# Altium PCB PMSM_M007R_Fan.PcbDoc
Units mil, origin at the board's own origin, x right, y up, seen from the top; angles counter-clockwise.
Board outline 2867 x 1502 mil, 2 copper layers (Top Layer, Bottom Layer); 61 components, 39 nets, 179 pads, 116 vias.
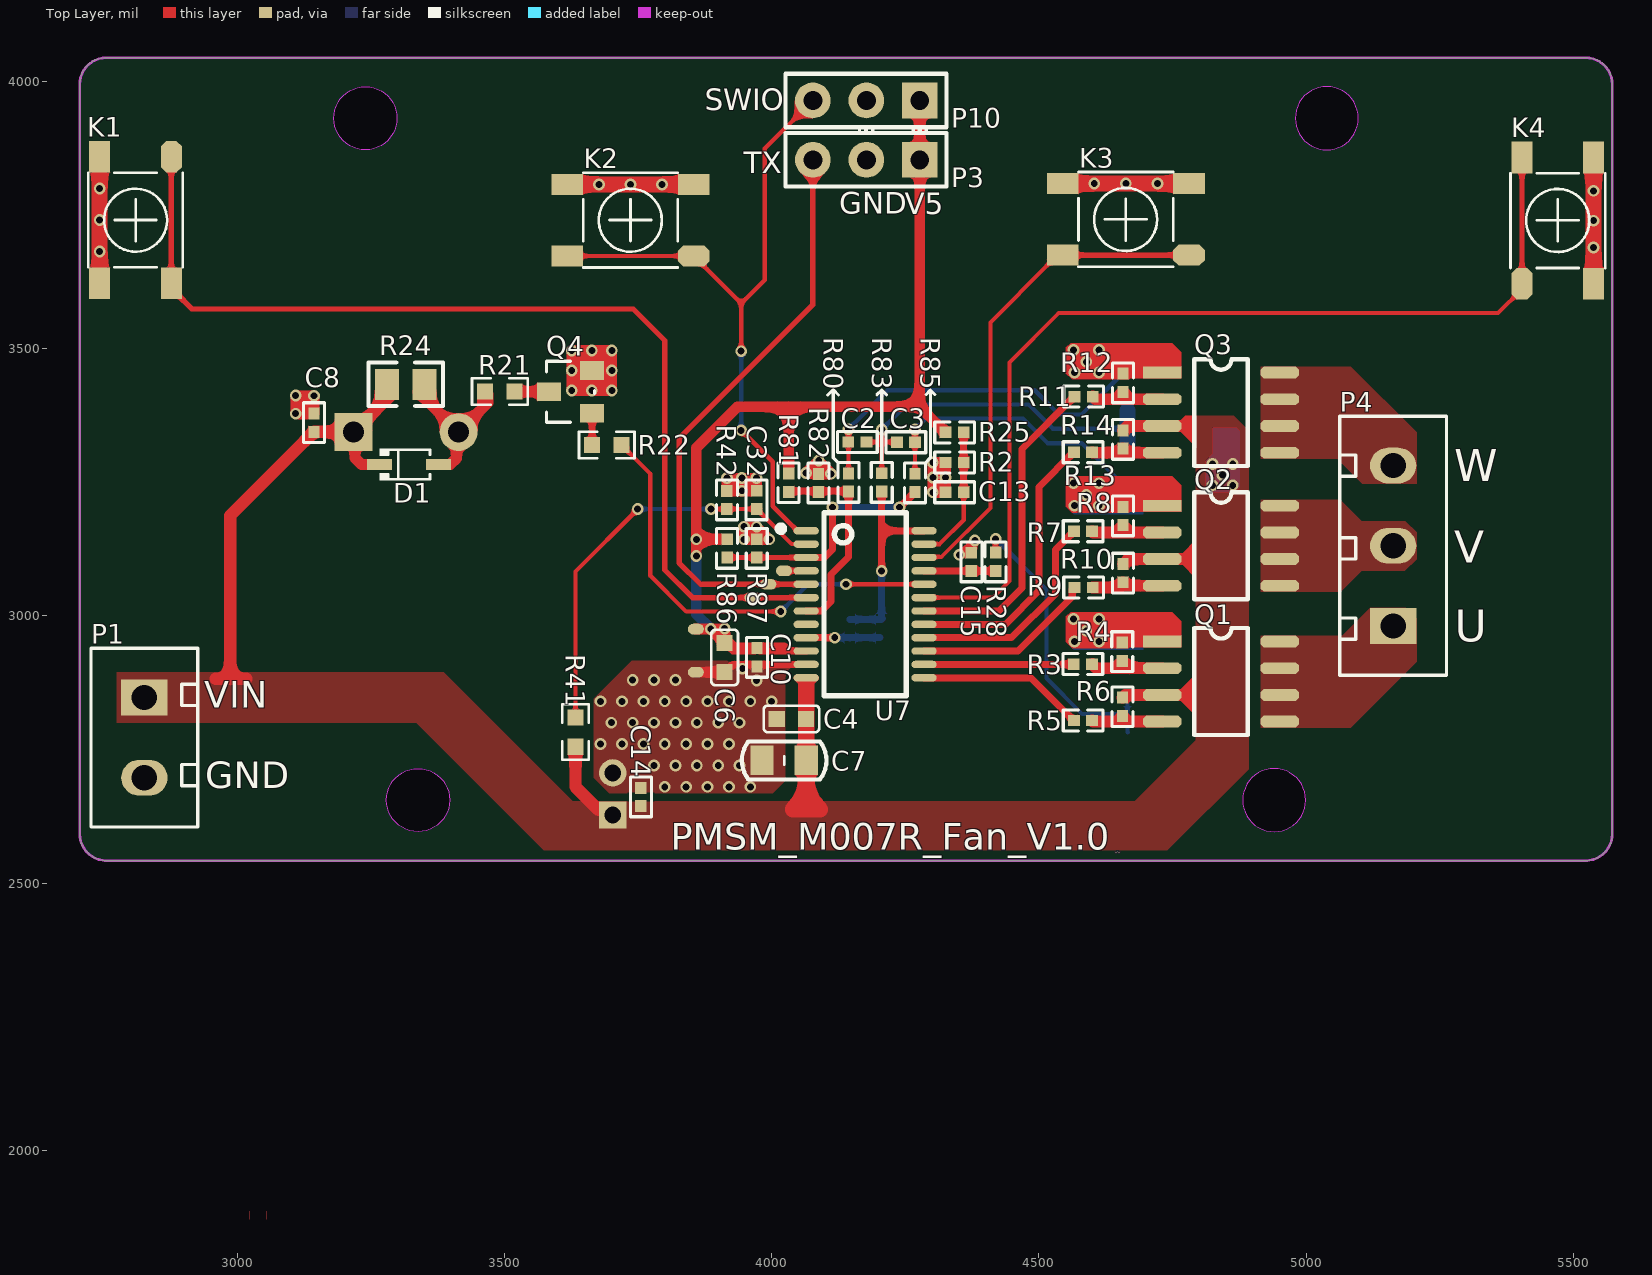
[diagram p0: Top Layer view]
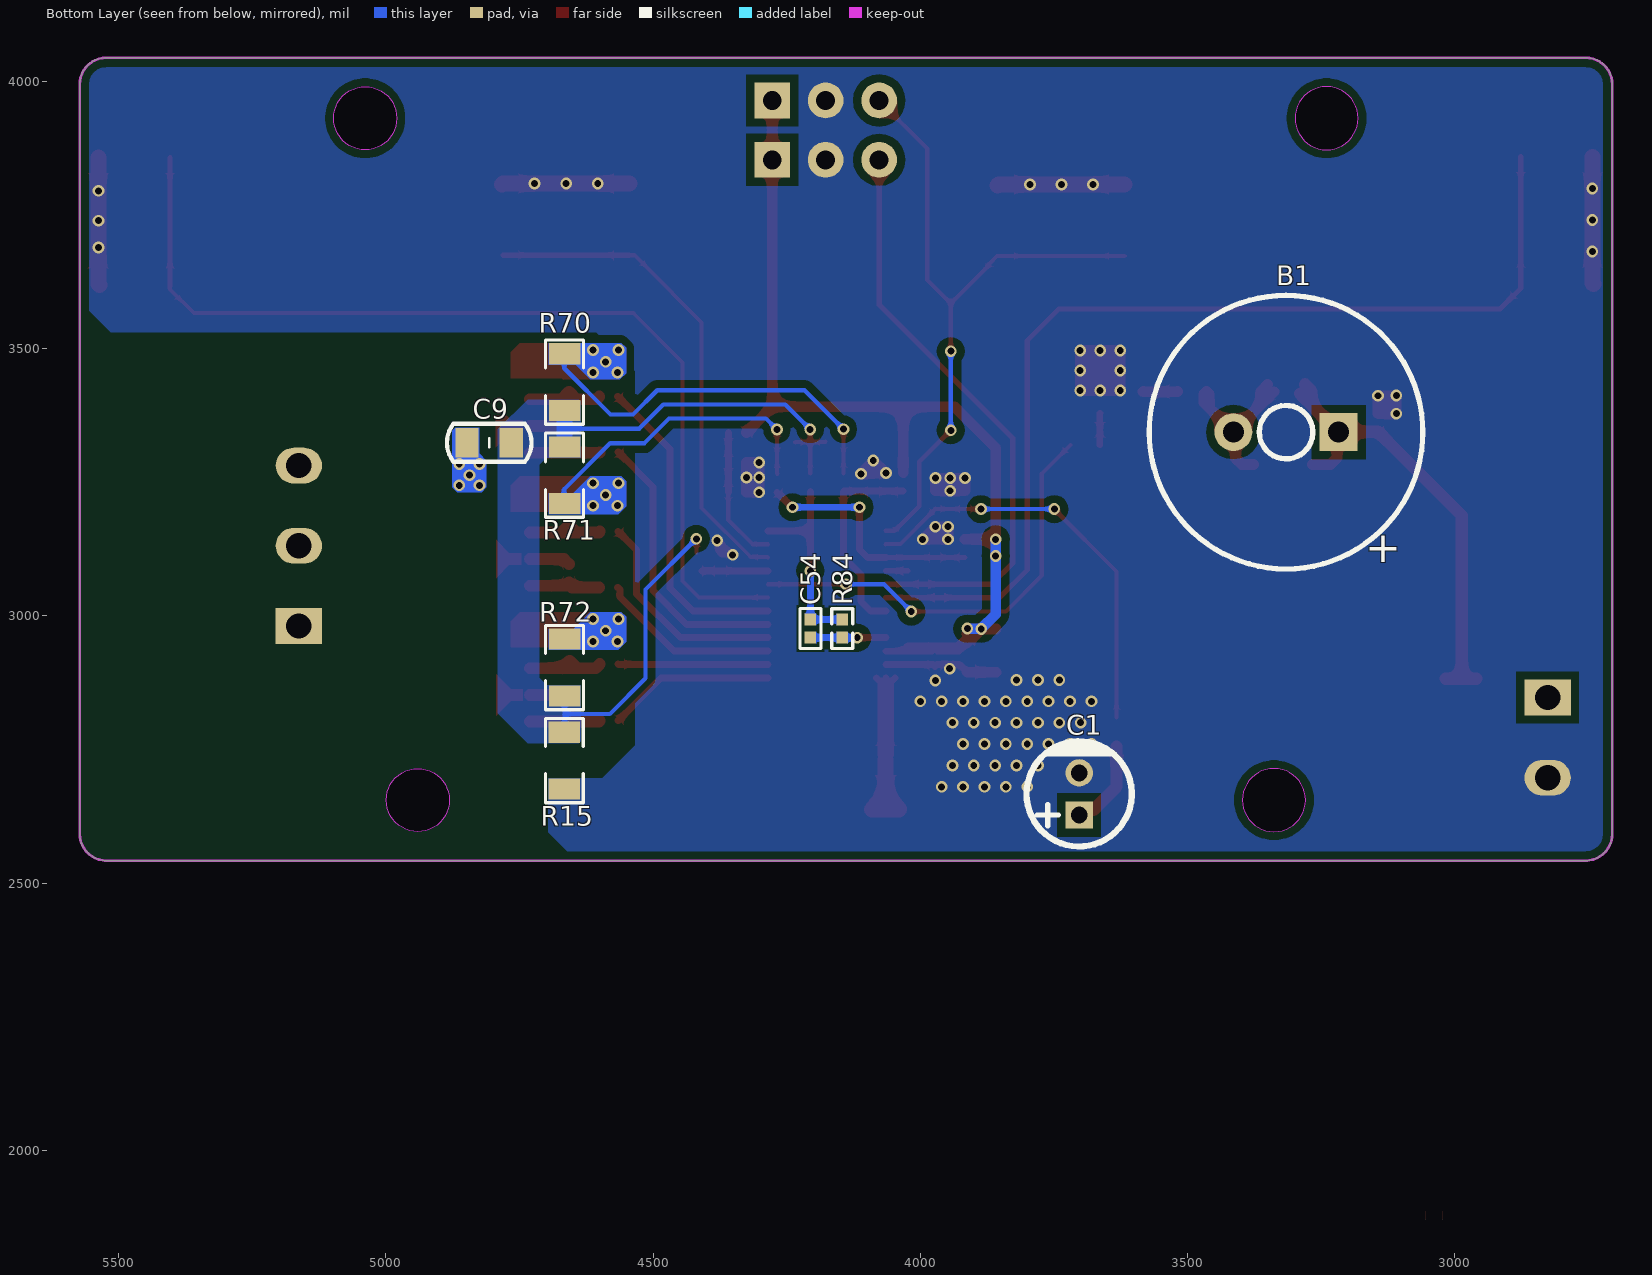
[diagram p1: Bottom Layer view, seen from below]

## Layer stack, top to bottom
Top Solder: solder mask 0.4, Solder Resist, Dk 3.5
Top Layer: signal copper 1.4
Dielectric1: dielectric 12.6, FR-4, Dk 4.8
Bottom Layer: signal copper 1.4
Bottom Solder: solder mask 0.4, Solder Resist, Dk 3.5

## Board outline
2705.52,2592 ccw(c2755.52,2592) 2755.52,2542 5522.52,2542 ccw(c5522.52,2592) 5572.52,2592 5572.52,3994 ccw(c5522.52,3994) 5522.52,4044 2791.52,4044 2755.52,4044 ccw(c2755.52,3994) 2705.52,3994
cut-out: 4880.96,2655.17 ccw(c4940.01,2655.17) 4940.01,2596.12 ccw(c4940.01,2655.17) 4999.07,2655.17 ccw(c4940.01,2655.17) 4940.01,2714.23 ccw(c4940.01,2655.17)
cut-out: 4979.38,3930.76 ccw(c5038.44,3930.76) 5038.44,3871.71 ccw(c5038.44,3930.76) 5097.49,3930.76 ccw(c5038.44,3930.76) 5038.44,3989.82 ccw(c5038.44,3930.76)
cut-out: 3338.44,2596.12 cw(c3338.44,2655.17) 3279.38,2655.17 cw(c3338.44,2655.17) 3338.44,2714.23 cw(c3338.44,2655.17) 3397.49,2655.17 cw(c3338.44,2655.17)
cut-out: 3240.01,3871.71 cw(c3240.01,3930.76) 3180.96,3930.76 cw(c3240.01,3930.76) 3240.01,3989.82 cw(c3240.01,3930.76) 3299.07,3930.76 cw(c3240.01,3930.76)

## Design rules (kind name [scope] priority, off if disabled: settings)
Clearance Clearance_1 [InPolygon] p1: gap=15 ignorepadtopadclearanceinfootprint=FALSE except(0: Arc-Hole Track-Hole SMDPad-Hole THPad-Hole Via-Hole Fill-Hole Poly-Hole Region-Hole Text-Hole)
Clearance [All] p2: gap=6 ignorepadtopadclearanceinfootprint=FALSE except(0: Arc-Hole Track-Hole SMDPad-Hole THPad-Hole Via-Hole Fill-Hole Poly-Hole Region-Hole Text-Hole)
PolygonConnect [All] p1: connectstyle=Direct reliefconductorwidth=10 reliefentries=4 polygonreliefangle="90 Angle" airgapwidth=10
RoutingVias [All] p1: holewidth=13 width=22 viastyle="Through Hole" minholewidth=13 minwidth=22 maxholewidth=28 maxwidth=50
SolderMaskExpansion [All] p1: expansion=4 istentingtop=FALSE
Width [All] p1: maxlimit=100 minlimit=6 preferedwidth=10 minimp=50.000000 maximp=50.000000 favimp=50.000000
30 further rules are at their usual default settings.

## Components (designator, comment, footprint, x,y, rotation, side; value= is the part's Value field where it differs from the comment)
B1 "BUZZER" M_BUZZER12550 3314.93,3344.42 r0 bottom locked
C1 "47uF/35V" M_C_RB_D5F2 3701,2667 r90 bottom
C2 "100pF" M_C0402- 4159.37,3324.63 r180 top
C3 "100pF" M_C0402- 4252,3325 r0 top
C4 "NC" M_C0603 4037,2805 r180 top
C6 "10uF" M_C0603 3914,2922 r270 top
C7 "10uF/25V" M_C0805 4026.34,2730.13 r180 top
C8 "0.1uF/25V" M_C0402- 3143.52,3362 r90 top
C9 "1uF/50V" M_C0805 4809.52,3323 r180 bottom
C10 "0.1uF" M_C0402- 3973,2921.49 r270 top
C13 "0.1uF" M_C0402- 4341.35,3230.63 r180 top
C14 "0.1uF/50V" M_C0402- 3755,2662 r90 top
C15 "1nF" M_C0402- 4373.95,3100.11 r270 top
C32 "0.1uF" M_C0402- 3971.45,3217.69 r90 top
C54 "NC" M_C0402- 4206,2977 r90 bottom
D1 "4148" SOD-323 3321.52,3283 r180 top
K1 "KH-6X6X8H-STM" KEY2-SMD 2807.98,3739.5 r270 top
K2 "KH-6X6X8H-STM" KEY2-SMD 3735.02,3741.98 r180 top
K3 "KH-6X6X8H-STM" KEY2-SMD 4661.59,3743.46 r180 top
K4 "KH-6X6X8H-STM" KEY2-SMD 5472.52,3740 r90 top
P1 "POWER" WJ15EDGRC3.81-2 2821.52,2772 r270 top
P3 "TXD" HDR2.54-LI-3P 4127,3853 r270 top
P4 "MHDR1X3" WJ15EDGRC3.81-3 5162.52,3131 r90 top
P10 "SWD" HDR2.54-LI-3P 4127,3964 r270 top
Q1 "" SOP8 4730.52,2952 r270 top
Q2 "" SOP8 4730.52,3206 r270 top
Q3 "" SOP8 4730.52,3455 r270 top
Q4 "S8050" SOT23 3623.52,3419 r90 top
R2 "1k 1%" M_R0402- 4343,3288 r0 top
R3 "47 Ω" M_R0402- 4581.22,2908.2 r180 top
R4 "20k" M_R0402- 4657.28,2932 r270 top
R5 "47 Ω" M_R0402- 4581.65,2802.63 r180 top
R6 "NC/(20k)" M_R0402- 4657.52,2829 r270 top
R7 "47 Ω" M_R0402- 4581.65,3156.63 r180 top
R8 "20k" M_R0402- 4658.52,3186 r270 top
R9 "47 Ω" M_R0402- 4582.65,3051.63 r180 top
R10 "NC/(20k)" M_R0402- 4658.52,3079 r270 top
R11 "47 Ω" M_R0402- 4582.65,3408.63 r180 top
R12 "20k" M_R0402- 4658.52,3435 r270 top
R13 "47 Ω" M_R0402- 4581.65,3304.63 r180 top
R14 "NC/(20k)" M_R0402- 4658.52,3329 r270 top
R15 "0R100/1W" M_R1206- 4667,2728 r90 bottom
R21 "100Ω" M_R0603 3518.52,3420.5 r180 top
R22 "1kΩ" M_R0603 3664.5,3318.5 r0 top
R24 "2kΩ" M_R0805 3348.52,3433 r180 top
R25 "15k 1%" M_R0402- 4341.35,3341.63 r180 top
R28 "10k" M_R0402- 4420.19,3100.18 r270 top
R41 "4.7k 1%" M_R0603 3632,2809.5 r270 top
R42 "1.5k 1%" M_R0402- 3917.63,3215.86 r270 top
R70 "0R100/1W" M_R1206- 4666.52,3436 r90 bottom
R71 "0R100/1W" M_R1206- 4664.52,3264 r270 bottom
R72 "0R100/1W" M_R1206- 4666.52,2902 r90 bottom
R80 "2.4k 1%" M_R0402- 4145.14,3248.63 r270 top
R81 "30k 1%" M_R0402- 4033,3248 r270 top
R82 "10k 1%" M_R0402- 4088.83,3247.7 r270 top
R83 "2.4k 1%" M_R0402- 4207.25,3248.75 r270 top
R84 "7.5k 1%" M_R0402- 4144.63,2975.22 r270 bottom
R85 "2.4k 1%" M_R0402- 4269.36,3247.86 r270 top
R86 "30k 1%" M_R0402- 3918,3125.22 r270 top
R87 "10k 1%" M_R0402- 3973.37,3125.22 r270 top
U7 "CH32M007E8R6" QSOP24 4064.53,3159 r270 top locked

## Footprints (in the part's own frame and the unit in brackets; to place one, negate y for a bottom-side part, rotate by r counter-clockwise, add the part's x,y. Pads: shape width x height; smd on the part's side, far side on the other; paste and mask are expansions set on the pad)
HDR2.54-LI-3P [mm]
  rect 1.7x1.7 hole 0.9: 1(0,3.81)
  round 1.7 hole 0.9: 2(0,1.27) 3(0,-1.27)
  silkscreen extent -1.27,-2.57 1.27,5.08, body extent -1.27,-2.54 1.27,5.08, height 8.5
KEY2-SMD [mm]
  oct 1.5x1 smd: 1(-3.023,1.749)
  rect 1.5x1 smd: 2(2.977,1.749) 3(-3.023,-1.651) 4(2.977,-1.651)
  silkscreen extent -2.27,-2.2 2.23,2.3, body extent -3.21,-2.55 3.19,2.65, height 1.5
M_BUZZER12550 [mm]
  rect 1.8x1.8 hole 1: 1(-2.477,0.023)
  round 1.8 hole 1: 2(2.523,0.023)
  silkscreen extent -6.48,-6.48 6.52,6.52
M_C0402- [mm]
  rect 0.566x0.54 smd mask+0.051: 1(-0.454,-0.009) 2(0.412,-0.009)
  silkscreen extent -0.97,-0.51 0.92,0.49
M_C0603 [mil]
  rect 30x30 smd: 1(-27.5,-2) 2(27.5,-2)
  silkscreen extent -52,-27 52,23
M_C0805 [mm]
  rect 1.1x1.4 smd: 1(-0.972,0.019) 2(1.128,0.019)
  silkscreen extent -1.93,-0.88 2.09,0.92
M_C_RB_D5F2 [mm]
  rect 1.3x1.3 hole 0.8: 1(-1.005,0.045)
  round 1.3 hole 0.8: 2(0.995,0.045)
  silkscreen extent -2.5,-2.45 2.49,2.55
M_R0402- [mm]
  rect 0.566x0.54 smd mask+0.051: 1(-0.454,-0.035) 2(0.412,-0.035)
  silkscreen extent -0.97,-0.53 0.92,0.46
M_R0603 [mil]
  rect 30x30 smd: 1(-0.5,1) 2(54.5,1)
  silkscreen extent -25,-24 79,26
M_R0805 [mm]
  rect 1.16x1.47 smd: 1(-0.051,0) 2(1.729,0)
  silkscreen extent -0.93,-1.04 2.61,1.03
M_R1206- [mm]
  rect 1x1.5 smd: 1(-1.325,-0.025) 2(1.375,-0.025)
  silkscreen extent -1.97,-0.93 2.03,0.87
QSOP24 [mm]
  oval 0.35x1.2 smd mask+0.051: 1(0,0) 2(0.635,0) 3(1.27,0) 4(1.905,0) 5(2.54,0) 6(3.175,0) 7(3.81,0) 8(4.445,0) 9(5.08,0) 10(5.715,0) 11(6.35,0) 12(6.985,0) 13(6.985,5.6) 14(6.35,5.6) 15(5.715,5.6) 16(5.08,5.6) 17(4.445,5.6) 18(3.81,5.6) 19(3.175,5.6) 20(2.54,5.6) 21(1.905,5.6) 22(1.27,5.6) 23(0.635,5.6) 24(0,5.6)
  silkscreen extent -0.86,-1.35 7.84,4.75
SOD-323 [mil]
  rect 47.24x20 smd: 1(-55,0) 2(55,0)
  silkscreen extent -39,-30 55,30
SOP8 [mil]
  rect 22x72 smd: 1(0,0)
  oct 22x72 smd: 2(50,0) 3(100,0) 4(150,0) 5(150,220) 6(100,220) 7(50,220) 8(0,220)
  silkscreen extent -25,60 175,160, body extent -24,-8 174,230, height 63
SOT23 [mil]
  rect 35x45 smd: 1(-40,-40) 2(40,-40) 3(0,40)
  silkscreen extent -57,-45 57,45
WJ15EDGRC3.81-2 [mm]
  rect 1.7x2.2 hole 1.2: 1(-1.905,0.127)
  oval 1.7x2.2 hole 1.2: 2(1.905,0.127)
  silkscreen extent -4.25,-2.41 4.25,2.67
WJ15EDGRC3.81-3 [mm]
  rect 1.7x2.2 hole 1.2: 1(-3.81,0)
  oval 1.7x2.2 hole 1.2: 2(0,0) 3(3.81,0)
  silkscreen extent -6.15,-2.54 6.15,2.54

## Part data
C1: library part "CAPACITOR POL_2", "Capacitor"
C2 C3 C4 C6 C7 C8 C9 C10 C13 C14 C15 C32 C54: library part "Cap Semi", "Capacitor (Semiconductor SIM Model)"
D1: library part "Diode 1N4148", "High Conductance Fast Diode"
P1: library part 2PIN
P3 P10: library part 3PIN
P4: "Header, 3-Pin"
Q1 Q2 Q3: library part NP9926BSR-G
Q4: library part NPN1
R2 R3 R4 R5 R6 R7 R8 R9 R10 R11 R12 R13 R14 R15 R21 R22 R24 R25 R28 R41 R42 R70 R71 R72 R80 R81 R82 R83 R84 R85 R86 R87: library part Res2, "Resistor"
U7: "RISC-V MCU, 48MHz, OPA/CMP/UART/I2C, 24V P/NMOS gate driver for motor"

## Free pads (board coordinates)
  oval 30x20 smd: 2(3858.12,2894.5) 2(3858.12,2975.12) 2(3964.26,3034) 2(3993.63,3059) 2(4023,3084)

## Via types
v1: diameter 22, hole 13, Top Layer to Bottom Layer, tented both sides, 116 vias

## Nets (pads, with @x,y where several pads share a name; then routed paths per layer and width w, separated by ;. In a path a pad name is that pad's centre, name@x,y a point inside that pad or via, vN(x,y) a via of type N, cw(c..) or ccw(c..) an arc to the next point about the centre after c; other vN are vias at no path point)
ADC_I1: C54.1 R84.2 U7.9 | length 138.5
  Top Layer w13: U7.9 v1(4118,2959)
  Bottom Layer w13: v1(4118,2959) R84.2 ; R84.2@4146,2958.49 R84.2 ; R84.2@4146.18,2959.18 R84.2@4146.07,2959.07 ; C54.1@4202.26,2959.35 4201.98,2959.07 R84.2@4146.07,2959.07 ; R84.2 R84.2@4146.07,2959.07
ADC_Vbus: C32.1 R41.1 R42.2 U7.2 | length 780.8
  Top Layer w8: R41.1 3633,3083 3749.35,3199.35 v1(3749.35,3199.65) ; v1(3886.63,3199.65) R42.2 3916.43,3199.82 C32.1 3972,3200 3972,3199.49 3978.63,3192.86 3978.89,3192.86 4037.29,3134.46 4064.07,3134.46 U7.2
  Bottom Layer w8: v1(3749.35,3199.65) v1(3886.63,3199.65)
BEEP_CTRL: R22.2 U7.20 | length 827.7
  Top Layer w8: R22.2 3773,3265.5 3773,3075 3840,3008 v1(4017,3008) ; v1(4139,3059) U7.20
  Bottom Layer w8: v1(4017,3008) 4068,3059 v1(4139,3059)
CMP1_N0: C15.2 R28.2 U7.21 | length 123.7
  Top Layer w13: U7.21 4285.11,3083.89 4352.63,3083.89 4408.52,3083.89 R28.2@4408.63,3083.78
CMP1_P0: C13.1 R2.2 R25.1 U7.23 | length 256.7
  Top Layer w8: U7.23 4314,3134 4359.22,3179.22 4359.22,3227.09 C13.1
  Top Layer w13: C13.1 R2.2 R25.1
GND: C1.2 C4.2 C6.2 C7.2 C8.2 C10.2 C13.2 C14.2 C15.1 C32.2 K1.3 K1.4 K2.3 K2.4 K3.3 K3.4 K4.3 K4.4 P1.2 P3.2 P10.2 pad.2@3858.12,2894.5 Q4.2 R2.1 R15.1 R42.1 R82.1 R87.1 U7.11 | length 2813.6
  Top Layer w13: C6.2 3926.5,2909 3968.5,2909 3972.63,2904.87 C10.2@3972.63,2904.78 ; C10.2@3972.63,2905.78 3975.7,2908.85 4064.38,2908.85 U7.11 ; v1@4353.72,3115.72 4352,3114 v1(4351,3114) 4352.72,3115.72 v1@4353.72,3115.72 ; v1@4353.72,3115.72 4371.49,3115.72 4377.76,3121.99 4377.76,3136.32 4380,3138.56 v1(4380,3141) 4379,3141 v1@4353.72,3115.72
  Top Layer w20: 3109.55,3395 3143.85,3394.92 ; pad.2@3858.12,2894.5 C6.2 ; R42.1 R42.1@3916.43,3233.91 ; C32.2@3972,3234.08 C32.2 ; R82.1 v1(4111.09,3265.56) 4110.71,3265.94 4110.71,3267.38 v1@4088,3290.09 ; v1(3626.03,3459) v1(3626.03,3496.48) 3644.77,3496.48 ; v1(3626.03,3459) v1(3626.03,3421.52) 3644.77,3421.52 ; v1(3626.03,3459) Q4.2@3644.77,3459 ; 3644.77,3421.52 Q4.2@3644.77,3459 ; 3644.77,3421.52 v1(3663.52,3421.52) ; Q4.2@3644.77,3459 3644.77,3496.48 ; Q4.2@3644.77,3459 Q4.2 ; 3644.77,3496.48 v1(3663.52,3496.48) ; v1(3663.52,3421.52) Q4.2 ; v1(3663.52,3421.52) 3682.26,3421.52 ; Q4.2 v1(3663.52,3496.48) ; Q4.2 Q4.2@3682.26,3459 ; v1(3663.52,3496.48) 3682.26,3496.48 ; 3682.26,3421.52 Q4.2@3682.26,3459 ; 3682.26,3421.52 v1(3701,3421.52) v1(3701,3459) ; Q4.2@3682.26,3459 3682.26,3496.48 ; Q4.2@3682.26,3459 v1(3701,3459) ; 3682.26,3496.48 v1(3701,3496.48) v1(3701,3459) ; R42.1@3916.43,3233.91 v1(3944.13,3233.91) ; R42.1@3916.43,3233.91 3916.43,3245.72 ; 3916.43,3245.72 v1(3916.43,3257.53) v1(3944.13,3257.53) ; 3916.43,3245.72 3944.13,3245.72 ; v1(3944.13,3233.91) C32.2 ; v1(3944.13,3233.91) 3944.13,3245.72 ; 3944.13,3245.72 v1(3944.13,3257.53) ; 3944.13,3245.72 3971.82,3245.72 ; v1(3944.13,3257.53) v1(3971.82,3257.53) 3971.82,3245.72 ; 3948.37,3154.89 v1(3948.37,3143.08) R87.1 ; 3948.37,3154.89 v1(3948.37,3166.71) v1(3972,3166.71) ; 3948.37,3154.89 3972,3154.89 ; C32.2 3971.82,3245.72 ; R87.1 3972,3154.89 ; R87.1 v1(3995.63,3143.08) v1(3972,3166.71) ; 3972,3154.89 v1(3972,3166.71) ; v1@4088,3290.09 v1(4088,3290.63) v1(4064.37,3267) 4088,3267 v1@4088,3290.09 ; 4301.51,3244.91 v1(4301.51,3231) C13.2 4325.14,3243 ; 4301.51,3244.91 v1(4301.51,3258.82) ; 4301.51,3244.91 4323.23,3244.91 4325.14,3243 ; v1(4301.51,3258.82) v1(4325.14,3258.82) ; v1(4301.51,3258.82) 4301.51,3272.72 ; 4301.51,3272.72 v1(4301.51,3286.63) R2.1 4325.14,3272.72 ; 4301.51,3272.72 4325.14,3272.72 ; 4325.14,3243 v1(4325.14,3258.82) ; v1(4325.14,3258.82) 4325.14,3272.72 ; v1(3109.52,3378) C8.2 3143.89,3394.92 v1(3143.89,3411.63) v1(3109.52,3412) 3109.52,3395 v1(3109.52,3378)
  Top Layer w30: K1.4@2741.02,3620.3 K1.4 v1(2743,3681.33) v1(2743,3740.39) v1(2743,3799.44) K1.3 ; K2.4 v1(3676.85,3806.97) v1(3735.91,3806.97) v1(3794.96,3806.97) K2.3 K2.3@3856,3804.98 ; K3.4 v1(4603.42,3808.44) v1(4662.48,3808.44) v1(4721.53,3808.44) K3.3 K3.3@4782.57,3806.46 ; K4.3@5535.52,3619.02 K4.3 v1(5537.5,3739.11) K4.4
  other v1: 3800,2680 3840,2680 3880,2680 3920,2680 3960,2680 3780,2720 3820,2720 3860,2720 3900,2720 3940,2720 3680,2760 3720,2760 3760,2760 3800,2760 3840,2760 3880,2760 3920,2760 3700,2800 3740,2800 3780,2800 3820,2800 3860,2800 3900,2800 3940,2800 3680,2840 3720,2840 3760,2840 3800,2840 3840,2840 3880,2840 3920,2840 3960,2840 4000,2840 3972,2879 3740,2880 3780,2880 3820,2880 3945,2901 5537.52,3689 5537.52,3795
I1_shunt: C2.1 C3.1 C9.2 R15.2 R28.1 R70.1 R71.1 R72.1 R83.1 | length 1277.2
  Top Layer w8: C2.1@4177.86,3325.37 4178.23,3325 4206,3325 ; R83.1@4205.77,3266.49 R83.1 4206,3266.73 4206,3325 ; v1(4206,3348.63) 4206,3325 ; C3.1 4233.77,3325 4206,3325 ; R28.1 v1@4418.81,3143.82
  Bottom Layer w8: v1(4206,3348.63) 4252.5,3395.13 4480.87,3395.13 4526,3350 4665.52,3350 ; v1(4419,3144) 4514,3049 4514,2883 4580.76,2816.24 4665.52,2816.24 ; R72.1 4665.52,2816.24 ; R15.2 4665.52,2782.63 4665.52,2816.24
  Bottom Layer w30: R71.1 4665.52,3350 4665.52,3379.17 R70.1
KEY1: K1.1 K1.2 pad.2@3964.26,3034 U7.6 | length 1924.6
  Top Layer w10: K1.1 K1.2 2876.86,3612.44 2915.3,3574 3741,3574 3800,3515 3800,3086 3852,3034 3964.26,3034 U7.6
KEY3: K3.1 K3.2 U7.22 | length 933.2
  Top Layer w7.5: U7.22 4286.2,3110.2 4317.2,3110.2 4409,3202 4409,3265 4409,3549.06 4518.59,3658.65 4534.52,3674.58 K3.2
  Top Layer w10: K3.2 K3.1
KEY4: K4.1 K4.2 U7.19 | length 1843.7
  Top Layer w7.5: U7.19 4414,3034 4445,3065 4445,3474 4537,3566 5359,3566 5403.64,3610.64 K4.1
  Top Layer w10: K4.1 K4.2
M1_CH1_H: R5.2 U7.13 | length 313.6
  Top Layer w13: U7.13 4484.93,2884 4564.93,2804 R5.2
M1_CH1_L: R3.2 U7.14 | length 280.8
  Top Layer w13: U7.14 4285.15,2909.15 4564.58,2909.15 R3.2@4565.44,2910
M1_CH2_H: R9.2 U7.15 | length 339
  Top Layer w13: U7.15 4461,2934 4561.8,3034.8 4561.8,3048.87 4565.93,3053 R9.2
M1_CH2_L: R7.2 U7.16 | length 411.2
  Top Layer w13: U7.16 4449,2959 4531,3041 4531,3123.56 R7.2
M1_CH3_H: R13.2 U7.17 | length 527.5
  Top Layer w13: U7.17 4437,2984 4500,3047 4500,3241.07 4564.93,3306 R13.2
M1_CH3_L: R11.2 U7.18 | length 599.9
  Top Layer w13: U7.18 4425,3009 4468,3052 4468,3312.07 4565.93,3410 R11.2
M1_Iu: Q1.1 R4.1 R72.2 | length 75.8
  Top Layer w20: R4.1 4655.91,2950.37 4657.54,2952 Q1.1
  other v1: 4566.52,2952 4612.52,2952 4588.52,2972 4564.52,2994 4612.52,2994
M1_Iv: C3.2 Q2.1 R8.1 R71.2 R85.1 | length 645.6
  Top Layer w8: R85.1@4267.77,3265.49 R85.1 4267.99,3324.41 C3.2 v1(4268.22,3348.26)
  Top Layer w22: R8.1 4657.38,3203.86 4659.52,3206 Q2.1
  Bottom Layer w8: v1(4268.22,3348.26) 4288.92,3368.97 4470.03,3368.97 4516,3323 4580,3323 4666.52,3236.48 R71.2@4666.52,3209.85
  other v1: 4566.52,3206 4612.52,3206 4588.52,3226 4564.52,3248 4612.52,3248
M1_Iw: C2.2 Q3.1 R12.1 R70.2 R80.1 | length 839.3
  Top Layer w8: R80.1 4143.77,3325.36 v1(4143.78,3349)
  Top Layer w22: R12.1 4657.38,3452.86 4659.52,3455 Q3.1
  Bottom Layer w8: v1(4143.78,3349) 4216.78,3422 4492,3422 4537.5,3376.5 4579.5,3376.5 4666.02,3463.02 R70.2@4666.02,3489.65 ; R70.2@4650.37,3475 R70.2 R70.2@4666.02,3489.65 ; R70.2@4686.52,3475 4680.66,3475 R70.2@4666.02,3489.65
  other v1: 4566.52,3455 4612.52,3455 4588.52,3475 4564.52,3497 4612.52,3497
M1_U: P4.1 Q1.5 Q1.6 Q1.7 Q1.8
M1_V: P4.2 Q2.5 Q2.6 Q2.7 Q2.8
M1_W: P4.3 Q3.5 Q3.6 Q3.7 Q3.8
NetB1_2: B1.2 D1.1 R21.2 R24.1 | length 375
  Top Layer w20: R24.1@3338.52,3419.26 3363.35,3394.43 ; R24.1 3363.35,3420.17 3363.35,3394.43 ; D1.1 3398.81,3283 3410.53,3294.72 3410.53,3339.76 B1.2 ; 3363.35,3394.43 B1.2 ; B1.2 3459.52,3388.75 ; 3459.52,3388.75 3469.52,3398.75 3469.52,3415 3464.52,3420 3459.52,3415 3459.52,3388.75
NetQ1_2: Q1.2 R3.1 R4.2 | length 190.1
  Top Layer w22: R3.1@4599.52,2910 4599.52,2909.76 4607.28,2902 4642.13,2902 ; 4686.32,2902 4670.17,2902 ; Q1.2 4670.17,2902 ; 4642.13,2902 4670.17,2902 ; 4642.13,2902 R4.2 4656.15,2915.78 4656.38,2915.78 4670.17,2902
NetQ1_4: Q1.4 R5.1 R6.2 | length 167.3
  Top Layer w22: R5.1 4599.52,2803.76 4601.28,2802 4645.13,2802 ; 4671.52,2802 4667.17,2802 ; Q1.4 4667.17,2802 ; 4645.13,2802 4655.91,2812.78 R6.2 4656.38,2812.78 4667.17,2802 ; 4645.13,2802 4667.17,2802
NetQ2_2: Q2.2 R7.1 R8.2 | length 187.1
  Top Layer w22: R7.1 4599.52,3157.76 4601.28,3156 4643.13,3156 ; 4686.82,3156 4671.17,3156 ; Q2.2 4671.17,3156 ; 4643.13,3156 4671.17,3156 ; 4643.13,3156 4656.91,3169.78 R8.2 4657.38,3169.78 4671.17,3156
NetQ2_4: Q2.4 R9.1 R10.2 | length 164.5
  Top Layer w22: R9.1 R10.2@4647.13,3053 ; 4673.52,3056 R10.2@4664.17,3056 ; Q2.4 R10.2@4664.17,3056 ; R10.2@4647.13,3053 4651.58,3053 4654.58,3056 R10.2@4664.17,3056 ; R10.2@4647.13,3053 4656.91,3062.78 R10.2 4657.38,3062.78 R10.2@4664.17,3056
NetQ3_2: Q3.2 R11.1 R12.2 | length 187.3
  Top Layer w22: R11.1 4600.52,3409.76 4605.28,3405 4643.13,3405 ; 4686.82,3405 4671.17,3405 ; Q3.2 4671.17,3405 ; 4643.13,3405 4656.91,3418.78 R12.2 4657.38,3418.78 4671.17,3405 ; 4643.13,3405 4671.17,3405
NetQ3_4: Q3.4 R13.1 R14.2 | length 162.4
  Top Layer w22: R13.1 4599.52,3305.76 4600.28,3305 R14.2@4649.13,3305 ; 4673.52,3305 R14.2@4665.17,3305 ; Q3.4 R14.2@4665.17,3305 ; R14.2@4649.13,3305 4656.91,3312.78 R14.2 4657.38,3312.78 R14.2@4665.17,3305 ; R14.2@4649.13,3305 R14.2@4665.17,3305
NetQ4_1: Q4.1 R22.1 | length 59.7
  Top Layer w12: Q4.1 3664,3378.52 R22.1
NetQ4_3: Q4.3 R21.1 | length 65.6
  Top Layer w20: R21.1 3519.27,3419.25 3582.77,3419.25 3583.02,3419.5 Q4.3 ; R21.1@3519.52,3420 R21.1@3520.02,3419.5
OPA_N0: C54.2 R83.2 R84.1 U7.24 | length 415.5
  Top Layer w13: v1(4205.77,3084) 4205.77,3146.76 ; R83.2@4205.77,3232.41 4205.77,3171.24 ; U7.24 4218,3159 ; 4205.77,3146.76 4218,3159 ; 4205.77,3146.76 4205.77,3161 ; 4205.77,3161 4207.77,3159 4218,3159 ; 4205.77,3161 4205.77,3171.24 ; 4205.77,3171.24 4218,3159
  Bottom Layer w13: R84.1 4146.07,2993.15 4205.56,2993.15 C54.2 C54.2@4205.7,2993.28 ; v1(4205.77,3084) 4205.7,3083.93 C54.2@4205.7,2993.28 ; C54.2@4207,2994.59 C54.2@4205.7,2993.28
OPA_P1: R80.2 R81.2 R82.2 U7.7 | length 385.3
  Top Layer w8: R81.2@4032,3233.92 R81.2@4032.75,3233.17 ; R80.2@4143.01,3233.17 R80.2
  Top Layer w13: R81.2@4032.75,3233.17 4088,3233.17 R80.2@4143.01,3233.17 ; U7.7 4064.68,3009.15 4093.15,3009.15 4111,3027 4111,3077 4143.77,3109.76 R80.2
OPA_P2: R85.2 R86.2 R87.2 U7.3 | length 448.4
  Top Layer w8: R85.2@4267.77,3230.91 R85.2@4267.77,3231.41
  Top Layer w10: R86.2 R87.2 U7.3
  Top Layer w13: U7.3 4099,3109 4114,3124 v1(4114,3203) ; v1(4239,3203) 4239.85,3203 R85.2@4267.77,3230.91
  Bottom Layer w13: v1(4114,3203) v1(4239,3203)
SWIO: K2.1 K2.2 P10.3 U7.1 | length 1284.1
  Top Layer w8: K2.2 K2.1 3856.36,3673.11 3872.04,3657.43 3872.04,3655.08 3943,3584.13 ; v1(3943,3347) 4002,3288 4002,3204.8 4047.8,3159 U7.1 ; v1(3943,3495) 3943,3584.13 ; P10.3 3987,3874 3987,3628.13 3943,3584.13
  Bottom Layer w8: v1(3943,3347) v1(3943,3495)
TP1: pad.2@4023,3084 U7.4 | length 41.5
  Top Layer w10: pad.2@4023,3084 U7.4
UART1_TX: P3.3 pad.2@3993.63,3059 U7.5 | length 1111.6
  Top Layer w10: U7.5 3993.63,3059 3867,3059 3827,3099 3827,3332 4077,3582 P3.3
V5: C6.1 C10.1 P3.1 P10.1 pad.2@3858.12,2975.12 R25.2 R81.1 R86.1 U7.10 | length 2241.8
  Top Layer w12: C6.1 3927.5,2934 3968,2934 3972.63,2938.63 C10.1@3972.63,2938.86 ; C6.1@3917,2958 3931,2944 3993,2944 ; C10.1 3977.99,2934 4003,2934 ; U7.10 4033.76,2934 ; 3993,2944 4003,2934 ; 3993,2944 4023.76,2944 4033.76,2934 ; 4003,2934 4033.76,2934
  Top Layer w20: pad.2@3858.12,2975.12 3885.62,2975.12 v1(3886,2975.5) ; v1(3859,3112) 3859,3127.5 ; R86.1 3874.58,3143.08 ; R81.1@4032,3268 4032,3370 ; P10.1 P3.1 P3.1@4277.14,3852.86 ; P3.1@4284,3846 P3.1@4277.14,3852.86 ; R25.2 4324.63,3343 4324,3343.63 4324,3344.14 4277.14,3391 ; 3859,3127.5 3859,3143 v1(3859.08,3143.08) ; 3859,3127.5 3874.58,3143.08 ; v1(3859.08,3143.08) 3874.58,3143.08 ; v1(3859.08,3143.08) 3859.08,3158.58 ; 3859.08,3158.58 3859.08,3313.92 3859,3314 3936,3391 4011,3391 ; 3859.08,3158.58 3874.58,3143.08 ; v1(3886,2975.5) 3886.25,2975.75 3911.75,2975.75 v1(3912,2976) C6.1 v1(3886,2975.5) ; 4011,3391 4032,3370 ; 4011,3391 4032,3391 ; 4032,3370 4032,3391 ; 4032,3370 4053,3391 ; 4032,3391 4053,3391 ; 4053,3391 4257.14,3391 ; 4257.14,3391 4277.14,3411 ; 4257.14,3391 4277.14,3391 ; 4277.14,3391 4277.14,3411 ; 4277.14,3411 P3.1@4277.14,3852.86
  Bottom Layer w20: v1(3859.08,3143.08) 3859.08,3002.96 3886,2976.04 v1(3886,2975.5) 3886.25,2975.75 3911.75,2975.75 v1(3912,2976)
Vin: B1.1 C1.1 C4.1 C7.1 C8.1 C9.1 C14.1 D1.2 P1.1 Q1.3 Q2.3 Q3.3 R6.1 R10.1 R14.1 R24.2 R41.2 U7.12 | length 2015.6
  Top Layer w13: U7.12@4047.62,2883.62 4056.12,2875.12 ; U7.12 4064.62,2883.91 4064.62,2866.62 ; U7.12@4082,2884 4073.31,2875.31 ; 4056.12,2875.12 4064.62,2866.62 ; 4056.12,2875.12 4056.12,2738.88 C7.1@4064.62,2730.38 ; C7.1@4064.62,2730.38 4065,2730 4073.31,2738.31 4073.31,2875.31 ; C7.1@4064.62,2730.38 4064.62,2866.62 ; 4064.62,2866.62 4073.31,2875.31
  Top Layer w20: B1.1 3220.52,3340.41 3220.52,3295 3232.52,3283 D1.2
  Top Layer w22: R6.1 4656.38,2846.86 4661.52,2852 Q1.3 ; R10.1 4657.38,3096.86 4666.52,3106 Q2.3 ; R14.1 4657.38,3346.86 4665.52,3355 Q3.3
  Top Layer w23: 2960,2882 2987,2882 ; 3017,2882 2987,2882 ; R24.2 3269.1,3421.67 3269.1,3395.19 ; R24.2@3289.52,3415.6 3269.1,3395.19 ; R41.2 3633,2680 3676,2637 3693.21,2637 C1.1 ; 2987,2882 2987,3187.25 C8.1 3210.79,3344.14 3213.79,3347.14 B1.1 3269.1,3395.19
  Top Layer w30: C7.1@4065,2730 4065,2663.22 ; 4065.19,2638.03 4090.19,2638.03 4065,2663.22 ; 4065,2663.22 4065,2638 4040,2638 4040,2638.22 4065,2663.22
  other v1: 4824.52,3244 4862.52,3244 4843.52,3263 4824.52,3284 4862.52,3284
pads on no net: U7.8

## Polygon pours and split planes (outlines as drawn)
Vin on Top Layer "NONET_L-01_P-001" (solid, pour order 0): 3387,2894 2775,2894 2775,2800 3335,2800 3573.97,2561.03 4740.03,2561.03 4892,2713 4892,3346.51 4864.49,3374.03 4793.54,3374.03 4793.48,2767.48 4679,2653 3628,2653
M1_V on Top Layer "NONET_L-01_P-001" (solid, pour order 1): 4914.52,3217 5063.51,3217 5103.51,3177 5185.52,3177 5206.52,3156 5206.52,3106 5184.51,3084 5103.51,3084 5064.51,3045 4914.52,3045
M1_W on Top Layer "NONET_L-01_P-001" (solid, pour order 2): 5206.52,3247 5206.52,3343 5083.52,3466 4914.52,3466 4914.52,3294 5057.52,3294 5104.51,3247
M1_U on Top Layer "NONET_L-01_P-001" (solid, pour order 3): 5119.51,3015 5186.52,3015 5206.52,2995 5206.52,2914 5083.52,2791 4914.52,2791 4914.52,2963 5067.52,2963
GND on Top Layer "GND_L01_P011" (solid, pour order 11): 3738,2916 3667,2845 3667,2697 3696,2668 4002,2668 4025,2691 4025,2877 4044,2896 4088,2896 4088,2916
I1_shunt on Bottom Layer "Bottom Layer-I1_shunt" (solid, remove dead copper, pour order 7): 4790,3348.52 4734.51,3404 4635.52,3404 4635.52,3296 4699.52,3296 4713,3282.52 4713,2884 4699,2870 4635,2870 4635,2762 4734,2762 4790,2818
GND on Bottom Layer "NONET_L-01_P-001" (solid, pour order 4): 4696,2696 4595,2696 4533,2758 4533,3457 4606,3530 5514.52,3530 5572.52,3588 5572.52,4008.18 5535.69,4045 2705.52,4045 2705.52,2541.69 4462.52,2541 4642,2541 4696,2595

## Keep-outs
Keep-Out Layer:
  pour cut-out: 3338.44,2596.12 cw(c3338.44,2655.17) 3279.38,2655.17 cw(c3338.44,2655.17) 3338.44,2714.23 cw(c3338.44,2655.17) 3397.49,2655.17 cw(c3338.44,2655.17)
  pour cut-out: 3338.44,2596.12 cw(c3338.44,2655.17) 3279.38,2655.17 cw(c3338.44,2655.17) 3338.44,2714.23 cw(c3338.44,2655.17) 3397.49,2655.17 cw(c3338.44,2655.17)
  pour cut-out: 4979.38,3930.76 ccw(c5038.44,3930.76) 5038.44,3871.71 ccw(c5038.44,3930.76) 5097.49,3930.76 ccw(c5038.44,3930.76) 5038.44,3989.82 ccw(c5038.44,3930.76)
  pour cut-out: 3240.01,3871.71 cw(c3240.01,3930.76) 3180.96,3930.76 cw(c3240.01,3930.76) 3240.01,3989.82 cw(c3240.01,3930.76) 3299.07,3930.76 cw(c3240.01,3930.76)
  lines w5: 2705.52,2592 ccw(c2755.52,2592) 2755.52,2542 5522.52,2542 ccw(c5522.52,2592) 5572.52,2592 5572.52,3994 ccw(c5522.52,3994) 5522.52,4044 2791.52,4044 2755.52,4044 ccw(c2755.52,3994) 2705.52,3994 2705.52,2592

## Other copper
Top Layer:
  region net Vin: 4743.52,2863 4765.52,2863 4793.52,2891 4793.52,2813 4765.52,2841 4743.52,2841
  region net Vin: 4746.52,3117 4768.52,3117 4793.51,3142 4793.52,3070 4768.52,3095 4746.52,3095
  region net M1_Iw: 4562.52,3442 4550.52,3454 4550.52,3501 4559.52,3510 4749.52,3510 4766.52,3493 4766.52,3444 4669.52,3444 4667.52,3442
  region net M1_Iv: 4562.52,3193 4550.52,3205 4550.52,3252 4559.52,3261 4749.52,3261 4766.52,3244 4766.52,3195 4669.52,3195 4667.52,3193
  region net Vin: 4743.52,3366 4765.52,3366 4773.51,3374 4794,3374 4794,3315.51 4765.52,3344 4743.52,3344
  region net M1_Iu: 4562.52,2939 4550.52,2951 4550.52,2998 4559.52,3007 4749.52,3007 4766.52,2990 4766.52,2941 4669.52,2941 4667.52,2939
  region net GND: 3626.03,3421.52 3701,3421.52 3701,3496.48 3626.03,3496.48
  region net V5: 3912,2976 3912,2963 3931,2944 4023.76,2944 4033.76,2934 3927.5,2934 3886.38,2975.12 3885.62,2975.12
  region net Vin: 4047.62,2883.62 4056.12,2875.12 4056.12,2737.88 4064.62,2729.38 4073.31,2738.07 4073.31,2875.31 4082,2884
Bottom Layer:
  region net M1_Iv: 4649,3229 4617,3261 4559.52,3261 4550.52,3252 4550.52,3205 4565.52,3190 4583.52,3190 4695.52,3190 4695.52,3229
  region net M1_Iw: 4645,3470 4617,3442 4562.52,3442 4550.52,3454 4550.52,3501 4559.52,3510 4695.52,3510 4695.52,3470
  region net Vin: 4825.52,3304 4825.52,3352 4869.52,3352 4875.52,3346 4875.52,3289 4875.51,3240 4866.52,3231 4839.52,3231 4820.52,3231 4811.52,3240 4811.52,3290
  region net M1_Iu: 4649,2975 4617,3007 4559.52,3007 4550.52,2998 4550.52,2951 4565.52,2936 4583.52,2936 4695.52,2936 4695.52,2975

## Silkscreen, mask and mechanical layers (free items; w line width, h text height)
Top Overlay:
  lines w5: 2770.84,3740.47 2849.01,3740.47 ; 2810.37,3701.11 2810.37,3779.11 ; 3696.75,3740.47 3774.92,3740.47 ; 3736,3701 3736,3779 ; 4623.04,3741.47 4701.21,3741.47 ; 4662.57,3702.11 4662.57,3780.11 ; 5431.04,3739.94 5509.21,3739.94 ; 5470.57,3700.57 5470.57,3778.57 5470.57,3700.57
  lines w6: 4105,3413 4115,3423 ; 4124.14,3286.63 4115,3295.76 4115,3423 ; 4125,3413 4115,3423 ; 4164,3905 4164,3914 ; 4189,3904 4189,3914 ; 4196.88,3413.12 4205.88,3422.12 ; 4205.88,3286.75 4205.88,3422.12 ; 4215,3413 4205.88,3422.12 ; 4265,3904 4265,3912 ; 4287.62,3285.86 4297,3295.24 4297,3422 ; 4289,3414 4297,3422 ; 4289,3903 4289,3913 ; 4305,3414 4297,3422
  lines w8: 4176.5,3903 4176.5,3914 ; 4277,3903 4277,3914
  text "SWIO" at 3875,3946 h40
  text "TX" at 3948,3828 h40
  text "GND" at 4126,3752 h40
  text "V5" at 4249,3751 h40
  text "W" at 5277,3252 h60
  text "V" at 5277,3099 h60
  text "U" at 5278,2951 h60
  text "VIN" at 2939,2828 h50
  text "GND" at 2940,2677 h50
  text "PMSM_M007R_Fan_V1.0" at 3811,2562.33 h50
  text "YYYY" at 4642.02,2554.5 h3
Mechanical 1:
  lines w5: 2773.52,4044.01 5524.52,4044.01 cw(c5524.52,3996) 5572.53,3996 5572.53,2595 cw(c5519.52,2595) 5519.52,2541.99 5475.63,2541.99 cw(c5475.02,2544.94) 5475.02,2541.92 2812,2542 ; 2779.56,4044.01 ccw(c2779.52,4041) 2779.52,4044.01 2758.52,4044.01 ccw(c2758.52,3991) 2705.5,3991 2705.5,3983.03 ccw(c2708.51,3983) 2705.5,3983 2705.5,2595 ccw(c2758.52,2595) 2705.5,2594.97 ccw(c2758.52,2595) 2758.52,2541.99 2812.4,2541.99 ccw(c2813.02,2544.94) 2813.02,2541.92 ; 3180.96,3930.76 cw(c3240.01,3930.76) 3240.01,3989.82 cw(c3240.01,3930.76) 3299.07,3930.76 cw(c3240.01,3930.76) 3240.01,3871.71 cw(c3240.01,3930.76) 3180.96,3930.76 ; 3279.38,2655.17 cw(c3338.44,2655.17) 3338.44,2714.23 cw(c3338.44,2655.17) 3397.49,2655.17 cw(c3338.44,2655.17) 3338.44,2596.12 cw(c3338.44,2655.17) 3279.38,2655.17 ; 4880.96,2655.17 cw(c4940.01,2655.17) 4940.01,2714.23 cw(c4940.01,2655.17) 4999.07,2655.17 cw(c4940.01,2655.17) 4940.01,2596.12 cw(c4940.01,2655.17) 4880.96,2655.17 ; 4979.38,3930.76 cw(c5038.44,3930.76) 5038.44,3989.82 cw(c5038.44,3930.76) 5097.49,3930.76 cw(c5038.44,3930.76) 5038.44,3871.71 cw(c5038.44,3930.76) 4979.38,3930.76

## Text inside footprints (layer, text, board x,y; h text height)
B1: Bottom Overlay "+" at 3099.93,3169.42 h100 r180